# Altium PCB PCB.PcbDoc (part 3 of 4)
Units mil, origin at the board's own origin, x right, y up, seen from the top; angles counter-clockwise.
Board outline 2958.79 x 990.23 mil, 2 copper layers (Component Side, Bottom Layer), stack 63.78 mil thick; 63 components, 40 nets, 198 pads, 73 vias.
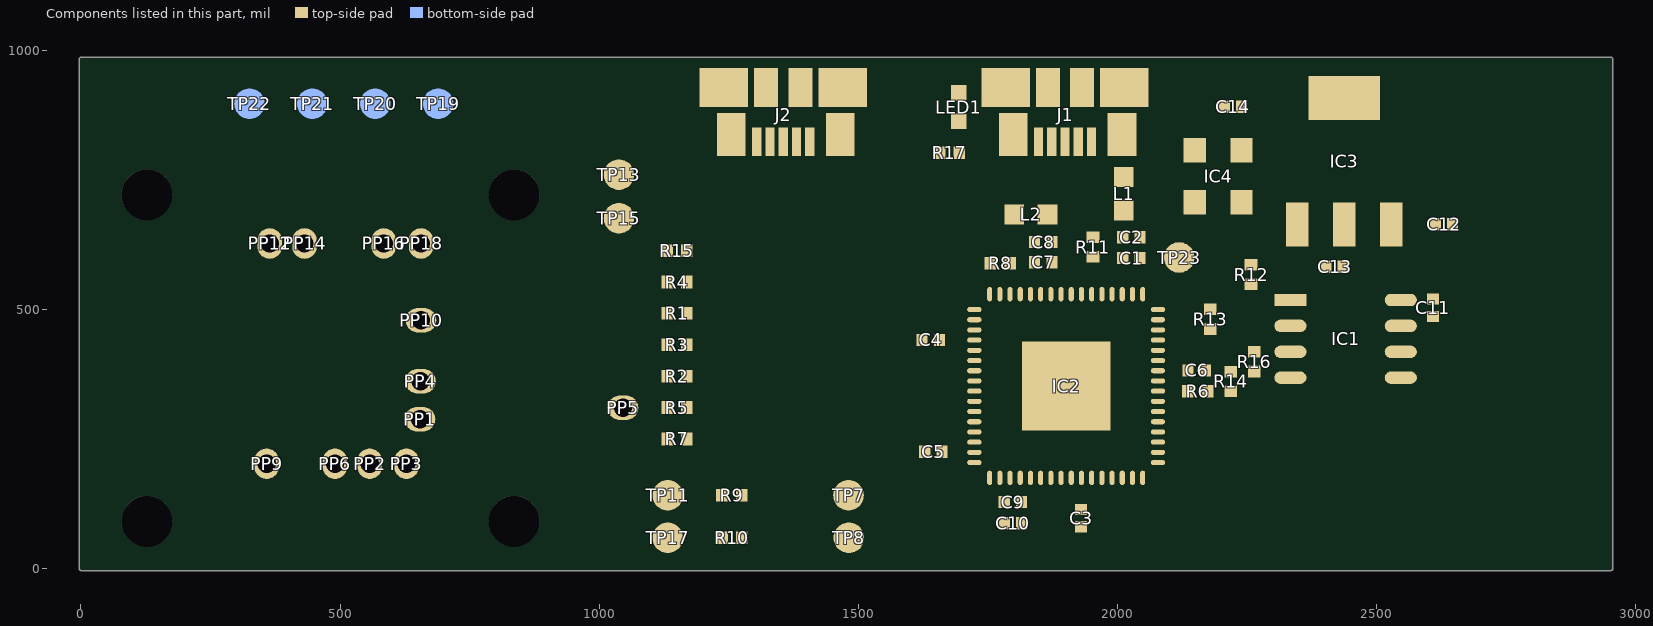
[diagram p3: the components of this part, seen from the top]

## Via types
v1: diameter 23.62, hole 9.84, Component Side to Bottom Layer, 73 vias

## Nets (pads, with @x,y where several pads share a name; then routed paths per layer and width w, separated by ;. In a path a pad name is that pad's centre, name@x,y a point inside that pad or via, vN(x,y) a via of type N, cw(c..) or ccw(c..) an arc to the next point about the centre after c; other vN are vias at no path point) (continued)
copper on no net: (continued)
  Component Side w0.3: 2786.45,721.99 2798.15,721.99 ; 2786.45,912.18 2837.15,912.18 ; 2786.75,702.79 2798.15,702.79 ; 2786.75,722.29 2797.85,722.29 ; 2787.05,702.49 2797.85,702.49 ; 2787.05,722.59 2797.55,722.59 ; 2787.05,912.48 2836.55,912.48 ; 2787.35,702.19 2797.55,702.19 ; 2787.65,701.89 2796.95,701.89 ; 2787.65,722.89 2796.95,722.89 ; 2787.95,701.59 2796.65,701.59 ; 2787.95,723.19 2796.65,723.19 ; 2787.95,912.78 2835.65,912.78 ; 2788.55,701.29 2796.05,701.29 ; 2788.55,723.49 2796.05,723.49 ; 2788.55,913.08 2835.05,913.08 ; 2789.15,700.99 2795.45,700.99 ; 2789.15,723.79 2795.45,723.79 ; 2789.45,913.38 2834.15,913.38 ; 2789.75,724.09 2794.55,724.09 ; 2790.05,700.69 2794.55,700.69 ; 2790.05,913.68 2833.55,913.68 ; 2790.95,913.98 2832.65,913.98 ; 2791.25,724.39 2793.35,724.39 ; 2791.55,914.28 2832.05,914.28 ; 2792.15,700.39 2792.75,700.39 ; 2792.15,914.58 2831.45,914.58 ; 2793.05,914.88 2830.55,914.88 ; 2793.65,915.18 2829.95,915.18 ; 2794.25,719.89 2803.25,719.89 ; 2794.25,915.48 2829.35,915.48 ; 2794.85,915.78 2828.75,915.78 ; 2795.15,916.08 2828.45,916.08 ; 2795.15,916.38 2828.45,916.38 ; 2795.45,705.19 2803.25,705.19 ; 2795.45,916.68 2828.15,916.68 ; 2795.45,916.98 2828.15,916.98 ; 2795.45,917.28 2828.15,917.28 ; 2795.45,917.58 2828.15,917.58 ; 2795.45,917.88 2828.15,917.88 ; 2795.75,719.59 2803.25,719.59 ; 2795.75,918.18 2827.85,918.18 ; 2795.75,918.48 2827.85,918.48 ; 2795.75,918.78 2827.85,918.78 ; 2795.75,919.08 2827.85,919.08 ; 2795.75,919.38 2827.85,919.38 ; 2795.75,919.68 2827.85,919.68 ; 2796.05,919.98 2827.55,919.98 ; 2796.05,920.28 2827.55,920.28 ; 2796.05,920.58 2827.55,920.58 ; 2796.05,920.88 2827.55,920.88 ; 2796.05,921.18 2827.55,921.18 ; 2796.35,705.49 2803.25,705.49 ; 2796.35,719.29 2803.25,719.29 ; 2796.35,921.48 2827.25,921.48 ; 2796.35,921.78 2827.25,921.78 ; 2796.35,922.08 2827.25,922.08 ; 2796.35,922.38 2827.25,922.38 ; 2796.35,922.68 2827.25,922.68 ; 2796.65,705.79 2803.25,705.79 ; 2796.65,718.99 2803.25,718.99 ; 2796.65,922.98 2826.95,922.98 ; 2796.65,923.28 2826.95,923.28 ; 2796.65,923.58 2826.95,923.58 ; 2796.65,923.88 2826.95,923.88 ; 2796.65,924.18 2826.95,924.18 ; 2796.65,924.48 2826.95,924.48 ; 2796.95,706.09 2803.25,706.09 ; 2796.95,924.78 2826.65,924.78 ; 2796.95,925.08 2826.65,925.08 ; 2796.95,925.38 2826.65,925.38 ; 2796.95,925.68 2826.65,925.68 ; 2796.95,925.98 2826.65,925.98 ; 2797.25,706.39 2803.25,706.39 ; 2797.25,718.39 2803.25,718.39 ; 2797.25,718.69 2803.25,718.69 ; 2797.25,926.28 2826.35,926.28 ; 2797.25,926.58 2826.35,926.58 ; 2797.25,926.88 2826.35,926.88 ; 2797.25,927.18 2826.35,927.18 ; 2797.25,927.48 2826.35,927.48 ; 2797.55,706.69 2803.25,706.69 ; 2797.55,706.99 2803.25,706.99 ; 2797.55,718.09 2803.25,718.09 ; 2797.55,927.78 2826.35,927.78 ; 2797.55,928.08 2826.05,928.08 ; 2797.55,928.38 2826.05,928.38 ; 2797.55,928.68 2826.05,928.68 ; 2797.55,928.98 2826.05,928.98 ; 2797.55,929.28 2826.05,929.28 ; 2797.85,707.29 2803.25,707.29 ; 2797.85,717.49 2803.25,717.49 ; 2797.85,717.79 2803.25,717.79 ; 2797.85,929.58 2825.75,929.58 ; 2797.85,929.88 2825.75,929.88 ; 2797.85,930.18 2825.75,930.18 ; 2797.85,930.48 2825.75,930.48 ; 2797.85,930.78 2825.75,930.78 ; 2798.15,707.59 2803.25,707.59 ; 2798.15,707.89 2803.25,707.89 ; 2798.15,708.19 2803.25,708.19 ; 2798.15,708.49 2803.25,708.49 ; 2798.15,716.59 2803.25,716.59 ; 2798.15,716.89 2803.25,716.89 ; 2798.15,717.19 2803.25,717.19 ; 2798.15,931.08 2825.45,931.08 ; 2798.15,931.38 2825.45,931.38 ; 2798.15,931.68 2825.45,931.68 ; 2798.15,931.98 2825.45,931.98 ; 2798.15,932.28 2825.45,932.28 ; 2798.15,932.58 2825.45,932.58 ; 2798.45,708.79 2803.25,708.79 ; 2798.45,709.09 2803.25,709.09 ; 2798.45,709.39 2803.25,709.39 ; 2798.45,709.69 2803.25,709.69 ; 2798.45,709.99 2803.25,709.99 ; 2798.45,710.29 2803.25,710.29 ; 2798.45,710.59 2803.25,710.59 ; 2798.45,710.89 2803.25,710.89 ; 2798.45,711.19 2803.25,711.19 ; 2798.45,711.49 2803.25,711.49 ; 2798.45,713.29 2803.25,713.29 ; 2798.45,713.59 2803.25,713.59 ; 2798.45,713.89 2803.25,713.89 ; 2798.45,714.19 2803.25,714.19 ; 2798.45,714.49 2803.25,714.49 ; 2798.45,714.79 2803.25,714.79 ; 2798.45,715.09 2803.25,715.09 ; 2798.45,715.39 2803.25,715.39 ; 2798.45,715.69 2803.25,715.69 ; 2798.45,715.99 2803.25,715.99 ; 2798.45,716.29 2803.25,716.29 ; 2798.45,932.88 2825.15,932.88 ; 2798.45,933.18 2825.15,933.18 ; 2798.45,933.48 2825.15,933.48 ; 2798.45,933.78 2825.15,933.78 ; 2798.45,934.08 2825.15,934.08 ; 2798.75,700.69 2803.25,700.69 ; 2798.75,700.99 2803.25,700.99 ; 2798.75,701.29 2803.25,701.29 ; 2798.75,701.59 2803.25,701.59 ; 2798.75,701.89 2803.25,701.89 ; 2798.75,702.19 2803.25,702.19 ; 2798.75,702.49 2803.25,702.49 ; 2798.75,702.79 2803.25,702.79 ; 2798.75,711.79 2803.25,711.79 ; 2798.75,712.09 2803.25,712.09 ; 2798.75,712.39 2803.25,712.39 ; 2798.75,712.69 2803.25,712.69 ; 2798.75,712.99 2803.25,712.99 ; 2798.75,721.99 2803.25,721.99 ; 2798.75,722.29 2803.25,722.29 ; 2798.75,722.59 2803.25,722.59 ; 2798.75,722.89 2803.25,722.89 ; 2798.75,723.19 2803.25,723.19 ; 2798.75,723.49 2803.25,723.49 ; 2798.75,723.79 2803.25,723.79 ; 2798.75,724.09 2803.25,724.09 ; 2798.75,724.39 2803.25,724.39 ; 2798.75,724.69 2803.25,724.69 ; 2798.75,724.99 2803.25,724.99 ; 2798.75,725.29 2803.25,725.29 ; 2798.75,725.59 2803.25,725.59 ; 2798.75,725.89 2803.25,725.89 ; 2798.75,726.19 2803.25,726.19 ; 2798.75,726.49 2803.25,726.49 ; 2798.75,726.79 2803.25,726.79 ; 2798.75,727.09 2803.25,727.09 ; 2798.75,727.39 2803.25,727.39 ; 2798.75,727.69 2803.25,727.69 ; 2798.75,727.99 2803.25,727.99 ; 2798.75,728.29 2803.25,728.29 ; 2798.75,728.59 2803.25,728.59 ; 2798.75,728.89 2803.25,728.89 ; 2798.75,729.19 2803.25,729.19 ; 2798.75,729.49 2803.25,729.49 ; 2798.75,729.79 2803.25,729.79 ; 2798.75,730.09 2803.25,730.09 ; 2798.75,730.39 2803.25,730.39 ; 2798.75,730.69 2803.25,730.69 ; 2798.75,730.99 2803.25,730.99 ; 2798.75,731.29 2803.25,731.29 ; 2798.75,731.59 2803.25,731.59 ; 2798.75,731.89 2803.25,731.89 ; 2798.75,732.19 2803.25,732.19 ; 2798.75,732.49 2803.25,732.49 ; 2798.75,732.79 2803.25,732.79 ; 2798.75,733.09 2803.25,733.09 ; 2798.75,733.39 2803.25,733.39 ; 2798.75,733.69 2803.25,733.69 ; 2798.75,934.38 2824.85,934.38 ; 2798.75,934.68 2824.85,934.68 ; 2798.75,934.98 2824.85,934.98 ; 2798.75,935.28 2824.85,935.28 ; 2798.75,935.58 2824.85,935.58 ; 2799.05,935.88 2824.55,935.88 ; 2799.05,936.18 2824.55,936.18 ; 2799.05,936.48 2824.55,936.48 ; 2799.05,936.78 2824.55,936.78 ; 2799.05,937.08 2824.55,937.08 ; 2799.05,937.38 2824.55,937.38 ; 2799.35,742.09 2818.85,742.09 ; 2799.35,937.68 2824.25,937.68 ; 2799.35,937.98 2824.25,937.98 ; 2799.35,938.28 2824.25,938.28 ; 2799.35,938.58 2824.25,938.58 ; 2799.35,938.88 2824.25,938.88 ; 2799.65,742.39 2808.35,742.39 ; 2799.65,939.18 2823.95,939.18 ; 2799.65,939.48 2823.95,939.48 ; 2799.95,741.79 2818.55,741.79 ; 2799.95,742.69 2807.15,742.69 ; 2799.95,939.78 2823.65,939.78 ; 2800.25,741.49 2818.25,741.49 ; 2800.25,742.99 2805.95,742.99 ; 2800.55,741.19 2817.95,741.19 ; 2800.55,743.29 2805.35,743.29 ; 2800.55,940.08 2823.05,940.08 ; 2800.85,740.89 2817.95,740.89 ; 2800.85,743.59 2804.75,743.59 ; 2800.85,754.09 2805.65,754.09 ; 2800.85,754.39 2805.65,754.39 ; 2800.85,754.69 2805.65,754.69 ; 2800.85,754.99 2805.65,754.99 ; 2800.85,755.29 2805.65,755.29 ; 2800.85,755.59 2805.65,755.59 ; 2801.15,743.89 2804.45,743.89 ; 2801.15,752.89 2807.15,752.89 ; 2801.15,753.19 2806.55,753.19 ; 2801.15,753.49 2805.95,753.49 ; 2801.15,753.79 2805.95,753.79 ; 2801.15,755.89 2805.65,755.89 ; 2801.15,756.19 2805.95,756.19 ; 2801.15,756.49 2805.95,756.49 ; 2801.15,756.79 2806.25,756.79 ; 2801.15,757.09 2806.55,757.09 ; 2801.45,740.59 2817.65,740.59 ; 2801.45,744.19 2803.85,744.19 ; 2801.45,751.99 2814.05,751.99 ; 2801.45,752.29 2811.35,752.29 ; 2801.45,752.59 2808.05,752.59 ; 2801.45,757.39 2807.15,757.39 ; 2801.45,757.69 2808.65,757.69 ; 2801.45,757.99 2817.95,757.99 ; 2801.75,740.29 2817.05,740.29 ; 2801.75,744.49 2803.55,744.49 ; 2801.75,751.39 2815.85,751.39 ; 2801.75,751.69 2815.25,751.69 ; 2801.75,758.29 2818.25,758.29 ; 2802.05,744.79 2803.25,744.79 ; 2802.05,751.09 2816.45,751.09 ; 2802.05,758.59 2818.55,758.59 ; 2802.05,758.89 2818.85,758.89 ; 2802.35,739.99 2816.75,739.99 ; 2802.35,745.09 2802.95,745.09 ; 2802.35,750.79 2817.05,750.79 ; 2802.35,759.19 2818.55,759.19 ; 2802.65,750.49 2817.35,750.49 ; 2802.65,759.49 2818.25,759.49 ; 2802.95,739.69 2816.45,739.69 ; 2802.95,750.19 2817.65,750.19 ; 2802.95,759.79 2817.65,759.79 ; 2803.25,749.89 2817.95,749.89 ; 2803.25,760.09 2817.35,760.09 ; 2803.55,739.39 2815.85,739.39 ; 2803.55,749.59 2818.25,749.59 ; 2803.55,760.39 2816.75,760.39 ; 2804.15,739.09 2815.25,739.09 ; 2804.15,749.29 2818.25,749.29 ; 2804.15,760.69 2816.15,760.69 ; 2804.45,760.99 2815.55,760.99 ; 2804.75,748.99 2818.55,748.99 ; 2805.05,738.79 2814.65,738.79 ; 2805.35,748.69 2818.85,748.69 ; 2805.35,761.29 2814.65,761.29 ; 2805.95,724.09 2810.75,724.09 ; 2805.95,738.49 2813.75,738.49 ; 2805.95,761.59 2813.75,761.59 ; 2806.25,723.19 2811.05,723.19 ; 2806.25,723.49 2811.05,723.49 ; 2806.25,723.79 2811.05,723.79 ; 2806.55,722.29 2811.35,722.29 ; 2806.55,722.59 2811.35,722.59 ; 2806.55,722.89 2811.35,722.89 ; 2806.55,748.39 2818.85,748.39 ; 2806.85,721.39 2811.65,721.39 ; 2806.85,721.69 2811.65,721.69 ; 2806.85,721.99 2811.35,721.99 ; 2807.15,720.49 2811.95,720.49 ; 2807.15,720.79 2811.65,720.79 ; 2807.15,721.09 2811.65,721.09 ; 2807.15,738.19 2812.25,738.19 ; 2807.45,719.29 2812.25,719.29 ; 2807.45,719.59 2812.25,719.59 ; 2807.45,719.89 2811.95,719.89 ; 2807.45,720.19 2811.95,720.19 ; 2807.45,761.89 2812.55,761.89 ; 2807.75,718.39 2812.55,718.39 ; 2807.75,718.69 2812.25,718.69 ; 2807.75,718.99 2812.25,718.99 ; 2808.05,717.49 2812.55,717.49 ; 2808.05,717.79 2812.55,717.79 ; 2808.05,718.09 2812.55,718.09 ; 2808.35,716.59 2812.85,716.59 ; 2808.35,716.89 2812.85,716.89 ; 2808.35,717.19 2812.85,717.19 ; 2808.65,715.69 2813.15,715.69 ; 2808.65,715.99 2813.15,715.99 ; 2808.65,716.29 2813.15,716.29 ; 2808.95,714.79 2813.45,714.79 ; 2808.95,715.09 2813.45,715.09 ; 2808.95,715.39 2813.15,715.39 ; 2809.25,713.89 2813.75,713.89 ; 2809.25,714.19 2813.45,714.19 ; 2809.25,714.49 2813.45,714.49 ; 2809.25,748.09 2818.85,748.09 ; 2809.55,712.69 2814.05,712.69 ; 2809.55,712.99 2814.05,712.99 ; 2809.55,713.29 2813.75,713.29 ; 2809.55,713.59 2813.75,713.59 ; 2809.85,711.79 2814.35,711.79 ; 2809.85,712.09 2814.05,712.09 ; 2809.85,712.39 2814.05,712.39 ; 2810.15,710.89 2814.35,710.89 ; 2810.15,711.19 2814.35,711.19 ; 2810.15,711.49 2814.35,711.49 ; 2810.45,709.99 2814.65,709.99 ; 2810.45,710.29 2814.65,710.29 ; 2810.45,710.59 2814.65,710.59 ; 2810.75,709.09 2814.95,709.09 ; 2810.75,709.39 2814.95,709.39 ; 2810.75,709.69 2814.95,709.69 ; 2811.05,708.19 2815.25,708.19 ; 2811.05,708.49 2815.25,708.49 ; 2811.05,708.79 2814.95,708.79 ; 2811.05,757.69 2817.65,757.69 ; 2811.35,707.29 2819.45,707.29 ; 2811.35,707.59 2819.75,707.59 ; 2811.35,707.89 2815.25,707.89 ; 2811.65,706.39 2819.45,706.39 ; 2811.65,706.69 2819.45,706.69 ; 2811.65,706.99 2819.45,706.99 ; 2811.65,742.39 2818.85,742.39 ; 2811.95,705.19 2818.85,705.19 ; 2811.95,705.49 2819.15,705.49 ; 2811.95,705.79 2819.15,705.79 ; 2811.95,706.09 2819.15,706.09 ; 2812.25,704.29 2818.85,704.29 ; 2812.25,704.59 2818.85,704.59 ; 2812.25,704.89 2818.85,704.89 ; 2812.25,747.79 2819.15,747.79 ; 2812.55,703.39 2818.55,703.39 ; 2812.55,703.69 2818.55,703.69 ; 2812.55,703.99 2818.55,703.99 ; 2812.55,742.69 2818.85,742.69 ; 2812.55,757.39 2817.65,757.39 ; 2812.85,702.49 2818.25,702.49 ; 2812.85,702.79 2818.25,702.79 ; 2812.85,703.09 2818.25,703.09 ; 2813.15,701.59 2817.95,701.59 ; 2813.15,701.89 2817.95,701.89 ; 2813.15,702.19 2817.95,702.19 ; 2813.45,700.69 2817.65,700.69 ; 2813.45,700.99 2817.65,700.99 ; 2813.45,701.29 2817.95,701.29 ; 2813.45,742.99 2819.15,742.99 ; 2813.45,747.49 2819.15,747.49 ; 2813.45,757.09 2817.35,757.09 ; 2813.45,876.18 2873.45,876.18 ; 2813.75,743.29 2819.15,743.29 ; 2814.05,743.59 2819.15,743.59 ; 2814.05,747.19 2819.15,747.19 ; 2814.05,756.79 2817.05,756.79 ; 2814.35,743.89 2819.45,743.89 ; 2814.35,746.89 2819.45,746.89 ; 2814.65,744.19 2819.45,744.19 ; 2814.65,744.49 2819.45,744.49 ; 2814.65,745.99 2819.45,745.99 ; 2814.65,746.29 2819.45,746.29 ; 2814.65,746.59 2819.45,746.59 ; 2814.65,756.49 2816.75,756.49 ; 2814.95,744.79 2819.45,744.79 ; 2814.95,745.09 2819.45,745.09 ; 2814.95,745.39 2819.45,745.39 ; 2814.95,745.69 2819.45,745.69 ; 2815.25,756.19 2816.45,756.19 ; 2815.55,755.89 2816.15,755.89 ; 2815.85,707.89 2819.75,707.89 ; 2815.85,708.19 2819.75,708.19 ; 2815.85,708.49 2820.05,708.49 ; 2815.85,875.88 2873.45,875.88 ; 2816.15,708.79 2820.05,708.79 ; 2816.15,709.09 2820.05,709.09 ; 2816.15,709.39 2820.35,709.39 ; 2816.45,709.69 2820.35,709.69 ; 2816.45,709.99 2820.35,709.99 ; 2816.45,710.29 2820.35,710.29 ; 2816.75,710.59 2820.65,710.59 ; 2816.75,710.89 2820.65,710.89 ; 2816.75,711.19 2820.65,711.19 ; 2817.05,711.49 2820.95,711.49 ; 2817.05,711.79 2820.95,711.79 ; 2817.05,712.09 2820.95,712.09 ; 2817.35,712.39 2821.25,712.39 ; 2817.35,712.69 2821.25,712.69 ; 2817.35,712.99 2821.25,712.99 ; 2817.35,875.58 2873.45,875.58 ; 2817.65,713.29 2821.25,713.29 ; 2817.65,713.59 2821.55,713.59 ; 2817.65,713.89 2821.55,713.89 ; 2817.95,714.19 2821.55,714.19 ; 2817.95,714.49 2821.85,714.49 ; 2817.95,714.79 2821.85,714.79 ; 2817.95,715.09 2821.85,715.09 ; 2818.25,715.39 2822.15,715.39 ; 2818.25,715.69 2822.15,715.69 ; 2818.25,715.99 2822.15,715.99 ; 2818.55,716.29 2822.15,716.29 ; 2818.55,716.59 2822.45,716.59 ; 2818.55,716.89 2822.45,716.89 ; 2818.55,875.28 2873.75,875.28 ; 2818.85,717.19 2822.45,717.19 ; 2818.85,717.49 2826.65,717.49 ; 2818.85,717.79 2826.35,717.79 ; 2819.15,718.09 2826.35,718.09 ; 2819.15,718.39 2826.35,718.39 ; 2819.15,718.69 2826.05,718.69 ; 2819.45,718.99 2826.05,718.99 ; 2819.45,719.29 2826.05,719.29 ; 2819.45,719.59 2825.75,719.59 ; 2819.75,719.89 2825.75,719.89 ; 2819.75,720.19 2825.75,720.19 ; 2819.75,720.49 2825.45,720.49 ; 2819.75,874.98 2873.75,874.98 ; 2820.05,720.79 2825.45,720.79 ; 2820.05,721.09 2825.45,721.09 ; 2820.05,721.39 2825.15,721.39 ; 2820.35,721.69 2825.15,721.69 ; 2820.35,721.99 2825.15,721.99 ; 2820.35,722.29 2825.15,722.29 ; 2820.35,874.68 2874.05,874.68 ; 2820.65,722.59 2824.85,722.59 ; 2820.65,722.89 2824.85,722.89 ; 2820.65,723.19 2824.85,723.19 ; 2820.95,723.49 2824.55,723.49 ; 2820.95,723.79 2824.55,723.79 ; 2820.95,724.09 2824.55,724.09 ; 2821.25,874.38 2874.05,874.38 ; 2821.55,826.98 2874.05,826.98 ; 2821.55,827.28 2874.35,827.28 ; 2821.55,827.58 2874.35,827.58 ; 2821.85,826.38 2873.75,826.38 ; 2821.85,826.68 2874.05,826.68 ; 2821.85,827.88 2874.35,827.88 ; 2821.85,874.08 2874.05,874.08 ; 2822.15,825.49 2873.45,825.49 ; 2822.15,825.78 2873.75,825.78 ; 2822.15,826.08 2873.75,826.08 ; 2822.15,828.18 2874.65,828.18 ; 2822.45,746.59 2827.25,746.59 ; 2822.45,746.89 2827.25,746.89 ; 2822.45,747.19 2827.25,747.19 ; 2822.45,747.49 2826.95,747.49 ; 2822.45,747.79 2826.95,747.79 ; 2822.45,748.09 2826.95,748.09 ; 2822.45,748.39 2826.95,748.39 ; 2822.45,748.69 2826.95,748.69 ; 2822.45,748.99 2826.95,748.99 ; 2822.45,749.29 2826.95,749.29 ; 2822.45,749.59 2826.95,749.59 ; 2822.45,749.89 2826.95,749.89 ; 2822.45,750.19 2826.95,750.19 ; 2822.45,750.49 2826.95,750.49 ; 2822.45,750.79 2826.95,750.79 ; 2822.45,751.09 2826.95,751.09 ; 2822.45,751.39 2826.95,751.39 ; 2822.45,751.69 2826.95,751.69 ; 2822.45,751.99 2826.95,751.99 ; 2822.45,752.29 2826.95,752.29 ; 2822.45,752.59 2826.95,752.59 ; 2822.45,752.89 2827.25,752.89 ; 2822.45,753.19 2827.25,753.19 ; 2822.45,753.49 2827.25,753.49 ; 2822.45,824.88 2873.15,824.88 ; 2822.45,825.18 2873.45,825.18 ; 2822.45,828.48 2874.65,828.48 ; 2822.45,873.78 2874.35,873.78 ; 2822.75,717.19 2826.65,717.19 ; 2822.75,745.09 2827.85,745.09 ; 2822.75,745.39 2827.55,745.39 ; 2822.75,745.69 2827.55,745.69 ; 2822.75,745.99 2827.25,745.99 ; 2822.75,746.29 2827.25,746.29 ; 2822.75,753.79 2827.25,753.79 ; 2822.75,754.09 2827.25,754.09 ; 2822.75,754.39 2827.55,754.39 ; 2822.75,754.69 2827.55,754.69 ; 2822.75,754.99 2827.85,754.99 ; 2822.75,824.28 2873.15,824.28 ; 2822.75,824.58 2873.15,824.58 ; 2823.05,716.29 2826.95,716.29 ; 2823.05,716.59 2826.95,716.59 ; 2823.05,716.89 2826.65,716.89 ; 2823.05,744.19 2828.45,744.19 ; 2823.05,744.49 2828.15,744.49 ; 2823.05,744.79 2827.85,744.79 ; 2823.05,755.29 2827.85,755.29 ; 2823.05,755.59 2828.15,755.59 ; 2823.05,755.89 2828.45,755.89 ; 2823.05,823.38 2872.55,823.38 ; 2823.05,823.68 2872.85,823.68 ; 2823.05,823.99 2872.85,823.99 ; 2823.05,828.78 2874.95,828.78 ; 2823.05,873.48 2874.35,873.48 ; 2823.35,715.09 2827.25,715.09 ; 2823.35,715.39 2827.25,715.39 ; 2823.35,715.69 2827.25,715.69 ; 2823.35,715.99 2826.95,715.99 ; 2823.35,743.29 2829.35,743.29 ; 2823.35,743.59 2829.05,743.59 ; 2823.35,743.89 2828.75,743.89 ; 2823.35,756.19 2828.75,756.19 ; 2823.35,756.49 2829.05,756.49 ; 2823.35,756.79 2829.35,756.79 ; 2823.35,822.78 2872.55,822.78 ; 2823.35,823.09 2872.55,823.09 ; 2823.35,829.08 2874.95,829.08 ; 2823.65,714.19 2827.55,714.19 ; 2823.65,714.49 2827.55,714.49 ; 2823.65,714.79 2827.55,714.79 ; 2823.65,742.69 2830.85,742.69 ; 2823.65,742.99 2829.95,742.99 ; 2823.65,757.09 2829.95,757.09 ; 2823.65,757.39 2830.85,757.39 ; 2823.65,821.88 2871.95,821.88 ; 2823.65,822.18 2872.25,822.18 ; 2823.65,822.49 2872.25,822.49 ; 2823.65,873.18 2874.65,873.18 ; 2823.95,713.29 2827.85,713.29 ; 2823.95,713.59 2827.85,713.59 ; 2823.95,713.89 2827.85,713.89 ; 2823.95,742.39 2840.45,742.39 ; 2823.95,757.69 2840.45,757.69 ; 2823.95,821.28 2871.95,821.28 ; 2823.95,821.59 2871.95,821.59 ; 2823.95,829.38 2874.95,829.38 ; 2824.25,712.09 2828.45,712.09 ; 2824.25,712.39 2828.15,712.39 ; 2824.25,712.69 2828.15,712.69 ; 2824.25,712.99 2828.15,712.99 ; 2824.25,741.79 2839.85,741.79 ; 2824.25,742.09 2840.15,742.09 ; 2824.25,757.99 2840.15,757.99 ; 2824.25,758.29 2839.85,758.29 ; 2824.25,820.68 2871.65,820.68 ; 2824.25,820.99 2871.65,820.99 ; 2824.25,829.68 2875.25,829.68 ; 2824.25,872.88 2874.65,872.88 ; 2824.55,711.19 2828.45,711.19 ; 2824.55,711.49 2828.45,711.49 ; 2824.55,711.79 2828.45,711.79 ; 2824.55,741.49 2839.55,741.49 ; 2824.55,758.59 2839.55,758.59 ; 2824.55,819.78 2871.35,819.78 ; 2824.55,820.09 2871.35,820.09 ; 2824.55,820.38 2871.35,820.38 ; 2824.85,710.29 2828.75,710.29 ; 2824.85,710.59 2828.75,710.59 ; 2824.85,710.89 2828.75,710.89 ; 2824.85,741.19 2839.55,741.19 ; 2824.85,758.89 2839.55,758.89 ; 2824.85,819.18 2871.05,819.18 ; 2824.85,819.49 2871.05,819.49 ; 2824.85,829.98 2875.25,829.98 ; 2824.85,872.58 2874.95,872.58 ; 2825.15,709.09 2829.35,709.09 ; 2825.15,709.39 2829.05,709.39 ; 2825.15,709.69 2829.05,709.69 ; 2825.15,709.99 2829.05,709.99 ; 2825.15,740.89 2839.25,740.89 ; 2825.15,759.19 2839.25,759.19 ; 2825.15,818.28 2870.75,818.28 ; 2825.15,818.59 2870.75,818.59 ; 2825.15,818.88 2870.75,818.88 ; 2825.15,830.28 2875.55,830.28 ; 2825.15,872.28 2874.95,872.28 ; 2825.45,708.19 2829.65,708.19 ; 2825.45,708.49 2829.35,708.49 ; 2825.45,708.79 2829.35,708.79 ; 2825.45,740.59 2838.95,740.59 ; 2825.45,759.49 2838.95,759.49 ; 2825.45,817.68 2870.45,817.68 ; 2825.45,817.99 2870.45,817.99 ; 2825.45,830.58 2875.55,830.58 ; 2825.75,707.29 2834.15,707.29 ; 2825.75,707.59 2834.15,707.59 ; 2825.75,707.89 2829.65,707.89 ; 2825.75,740.29 2838.65,740.29 ; 2825.75,759.79 2838.65,759.79 ; 2825.75,816.79 2870.15,816.79 ; 2825.75,817.09 2870.15,817.09 ; 2825.75,817.38 2870.15,817.38 ; 2825.75,871.98 2874.95,871.98 ; 2826.05,706.09 2833.55,706.09 ; 2826.05,706.39 2833.85,706.39 ; 2826.05,706.69 2833.85,706.69 ; 2826.05,706.99 2833.85,706.99 ; 2826.05,739.99 2838.35,739.99 ; 2826.05,760.09 2838.35,760.09 ; 2826.05,816.18 2870.15,816.18 ; 2826.05,816.49 2870.15,816.49 ; 2826.05,830.88 2875.55,830.88 ; 2826.05,871.68 2875.25,871.68 ; 2826.35,705.19 2833.25,705.19 ; 2826.35,705.49 2833.55,705.49 ; 2826.35,705.79 2833.55,705.79 ; 2826.35,739.69 2837.75,739.69 ; 2826.35,760.39 2837.75,760.39 ; 2826.35,815.59 2870.45,815.59 ; 2826.35,815.89 2870.45,815.89 ; 2826.35,831.18 2875.85,831.18 ; 2826.65,704.29 2832.95,704.29 ; 2826.65,704.59 2833.25,704.59 ; 2826.65,704.89 2833.25,704.89 ; 2826.65,814.69 2871.05,814.69 ; 2826.65,814.99 2871.05,814.99 ; 2826.65,815.29 2870.75,815.29 ; 2826.65,831.48 2875.85,831.48 ; 2826.65,871.38 2875.25,871.38 ; 2826.95,703.09 2832.65,703.09 ; 2826.95,703.39 2832.65,703.39 ; 2826.95,703.69 2832.95,703.69 ; 2826.95,703.99 2832.95,703.99 ; 2826.95,739.39 2837.45,739.39 ; 2826.95,760.69 2837.45,760.69 ; 2826.95,814.09 2871.65,814.09 ; 2826.95,814.39 2871.35,814.39 ; 2826.95,871.08 2875.55,871.08 ; 2827.25,702.19 2832.35,702.19 ; 2827.25,702.49 2832.35,702.49 ; 2827.25,702.79 2832.65,702.79 ; 2827.25,739.09 2836.85,739.09 ; 2827.25,813.19 2872.25,813.19 ; 2827.25,813.49 2871.95,813.49 ; 2827.25,813.79 2871.65,813.79 ; 2827.25,831.78 2876.15,831.78 ; 2827.25,870.78 2875.55,870.78 ; 2827.55,701.29 2832.05,701.29 ; 2827.55,701.59 2832.05,701.59 ; 2827.55,701.89 2832.35,701.89 ; 2827.55,760.99 2836.85,760.99 ; 2827.55,812.59 2872.55,812.59 ; 2827.55,812.89 2872.25,812.89 ; 2827.55,832.08 2876.15,832.08 ; 2827.85,700.69 2832.05,700.69 ; 2827.85,700.99 2832.05,700.99 ; 2827.85,811.99 2872.85,811.99 ; 2827.85,812.29 2872.85,812.29 ; 2827.85,832.38 2876.15,832.38 ; 2827.85,870.48 2875.85,870.48 ; 2828.15,738.79 2836.25,738.79 ; 2828.15,761.29 2836.25,761.29 ; 2828.15,811.09 2873.75,811.09 ; 2828.15,811.39 2873.45,811.39 ; 2828.15,811.69 2873.15,811.69 ; 2828.15,832.68 2876.45,832.68 ; 2828.15,870.18 2875.85,870.18 ; 2828.45,810.49 2874.05,810.49 ; 2828.45,810.79 2873.75,810.79 ; 2828.45,832.98 2876.45,832.98 ; 2828.45,869.88 2875.85,869.88 ; 2828.75,738.49 2835.35,738.49 ; 2828.75,809.59 2874.65,809.59 ; 2828.75,809.89 2874.35,809.89 ; 2828.75,810.19 2874.35,810.19 ; 2828.75,833.28 2876.75,833.28 ; 2828.75,869.58 2876.15,869.58 ; 2829.05,761.59 2835.35,761.59 ; 2829.05,808.99 2874.95,808.99 ; 2829.05,809.29 2874.95,809.29 ; 2829.05,869.28 2876.15,869.28 ; 2829.35,808.09 2875.55,808.09 ; 2829.35,808.39 2875.55,808.39 ; 2829.35,808.69 2875.25,808.69 ; 2829.35,833.58 2876.75,833.58 ; 2829.35,868.98 2876.45,868.98 ; 2829.65,807.49 2876.15,807.49 ; 2829.65,807.79 2875.85,807.79 ; 2829.65,833.88 2876.75,833.88 ; 2829.65,868.68 2876.45,868.68 ; 2829.95,738.19 2834.15,738.19 ; 2829.95,761.89 2834.45,761.89 ; 2829.95,806.89 2876.45,806.89 ; 2829.95,807.19 2876.15,807.19 ; 2829.95,834.18 2877.05,834.18 ; 2829.95,868.38 2876.75,868.38 ; 2830.25,707.89 2834.15,707.89 ; 2830.25,708.19 2834.45,708.19 ; 2830.25,708.49 2834.45,708.49 ; 2830.25,708.79 2834.45,708.79 ; 2830.25,805.99 2877.05,805.99 ; 2830.25,806.29 2876.75,806.29 ; 2830.25,806.59 2876.75,806.59 ; 2830.25,834.48 2877.35,834.48 ; 2830.25,834.78 2877.35,834.78 ; 2830.25,868.08 2877.35,868.08 ; 2830.55,709.09 2834.45,709.09 ; 2830.55,709.39 2834.75,709.39 ; 2830.55,709.69 2834.75,709.69 ; 2830.55,709.99 2834.75,709.99 ; 2830.55,805.39 2877.65,805.39 ; 2830.55,805.69 2877.35,805.69 ; 2830.55,835.08 2877.95,835.08 ; 2830.55,867.78 2877.95,867.78 ; 2830.85,710.29 2835.05,710.29 ; 2830.85,710.59 2835.05,710.59 ; 2830.85,710.89 2835.05,710.89 ; 2830.85,804.49 2878.25,804.49 ; 2830.85,804.79 2877.95,804.79 ; 2830.85,805.09 2877.65,805.09 ; 2830.85,835.38 2879.15,835.38 ; 2830.85,867.48 2879.45,867.48 ; 2831.15,711.19 2835.35,711.19 ; 2831.15,711.49 2835.35,711.49 ; 2831.15,711.79 2835.35,711.79 ; 2831.15,712.09 2835.65,712.09 ; 2831.15,803.89 2878.55,803.89 ; 2831.15,804.19 2878.25,804.19 ; 2831.15,835.68 2880.65,835.68 ; 2831.15,866.88 2882.75,866.88 ; 2831.15,867.18 2880.95,867.18 ; 2831.45,712.39 2835.65,712.39 ; 2831.45,712.69 2835.65,712.69 ; 2831.45,712.99 2835.95,712.99 ; 2831.45,713.29 2835.95,713.29 ; 2831.45,803.29 2878.85,803.29 ; 2831.45,803.59 2878.85,803.59 ; 2831.45,835.98 2882.15,835.98 ; 2831.45,866.58 2884.25,866.58 ; 2831.75,713.59 2835.95,713.59 ; 2831.75,713.89 2836.25,713.89 ; 2831.75,714.19 2836.25,714.19 ; 2831.75,802.39 2879.45,802.39 ; 2831.75,802.69 2879.45,802.69 ; 2831.75,802.99 2879.15,802.99 ; 2831.75,836.28 2883.95,836.28 ; 2831.75,836.58 2885.45,836.58 ; 2831.75,866.28 2885.75,866.28 ; 2832.05,714.49 2836.25,714.49 ; 2832.05,714.79 2836.55,714.79 ; 2832.05,715.09 2836.55,715.09 ; 2832.05,715.39 2836.55,715.39 ; 2832.05,801.79 2880.05,801.79 ; 2832.05,802.09 2879.75,802.09 ; 2832.05,836.88 2887.25,836.88 ; 2832.05,865.68 2889.05,865.68 ; 2832.05,865.98 2887.55,865.98 ; 2832.35,715.69 2836.55,715.69 ; 2832.35,715.99 2836.85,715.99 ; 2832.35,716.29 2836.85,716.29 ; 2832.35,716.59 2836.85,716.59 ; 2832.35,800.89 2880.65,800.89 ; 2832.35,801.19 2880.35,801.19 ; 2832.35,801.49 2880.05,801.49 ; 2832.35,837.18 2888.75,837.18 ; 2832.35,837.48 2890.25,837.48 ; 2832.35,865.38 2890.85,865.38 ; 2832.65,716.89 2837.15,716.89 ; 2832.65,717.19 2837.15,717.19 ; 2832.65,717.49 2837.15,717.49 ; 2832.65,800.29 2880.95,800.29 ; 2832.65,800.59 2880.95,800.59 ; 2832.65,837.78 2892.05,837.78 ; 2832.65,864.78 2893.85,864.78 ; 2832.65,865.08 2892.35,865.08 ; 2832.95,717.79 2837.45,717.79 ; 2832.95,718.09 2837.45,718.09 ; 2832.95,718.39 2837.45,718.39 ; 2832.95,718.69 2837.75,718.69 ; 2832.95,799.39 2881.55,799.39 ; 2832.95,799.69 2881.55,799.69 ; 2832.95,799.99 2881.25,799.99 ; 2832.95,838.08 2893.55,838.08 ; 2832.95,838.38 2895.05,838.38 ; 2832.95,864.48 2895.65,864.48 ; 2833.25,718.99 2837.75,718.99 ; 2833.25,719.29 2837.75,719.29 ; 2833.25,719.59 2838.05,719.59 ; 2833.25,719.89 2838.05,719.89 ; 2833.25,757.39 2840.45,757.39 ; 2833.25,798.79 2882.15,798.79 ; 2833.25,799.09 2881.85,799.09 ; 2833.25,838.68 2896.85,838.68 ; 2833.25,863.88 2898.65,863.88 ; 2833.25,864.18 2897.15,864.18 ; 2833.55,720.19 2838.05,720.19 ; 2833.55,720.49 2838.35,720.49 ; 2833.55,720.79 2838.35,720.79 ; 2833.55,742.69 2840.45,742.69 ; 2833.55,798.19 2882.45,798.19 ; 2833.55,798.49 2882.15,798.49 ; 2833.55,838.98 2898.35,838.98 ; 2833.55,839.28 2899.55,839.28 ; 2833.55,863.28 2900.15,863.28 ; 2833.55,863.58 2899.85,863.58 ; 2833.85,721.09 2838.35,721.09 ; 2833.85,721.39 2838.65,721.39 ; 2833.85,721.69 2838.65,721.69 ; 2833.85,721.99 2838.65,721.99 ; 2833.85,797.29 2882.75,797.29 ; 2833.85,797.59 2882.75,797.59 ; 2833.85,797.89 2882.45,797.89 ; 2833.85,839.58 2900.15,839.58 ; 2833.85,839.88 2900.15,839.88 ; 2833.85,862.68 2900.45,862.68 ; 2833.85,862.98 2900.45,862.98 ; 2834.15,722.29 2838.95,722.29 ; 2834.15,722.59 2838.95,722.59 ; 2834.15,722.89 2838.95,722.89 ; 2834.15,723.19 2838.95,723.19 ; 2834.15,742.99 2840.75,742.99 ; 2834.15,757.09 2840.75,757.09 ; 2834.15,796.69 2882.45,796.69 ; 2834.15,796.99 2882.45,796.99 ; 2834.15,840.18 2900.45,840.18 ; 2834.15,840.48 2900.45,840.48 ; 2834.15,862.08 2900.45,862.08 ; 2834.15,862.38 2900.45,862.38 ; 2834.45,723.49 2839.25,723.49 ; 2834.45,723.79 2839.25,723.79 ; 2834.45,724.09 2839.25,724.09 ; 2834.45,795.79 2881.55,795.79 ; 2834.45,796.09 2881.85,796.09 ; 2834.45,796.39 2882.15,796.39 ; 2834.45,840.78 2900.45,840.78 ; 2834.45,841.08 2900.45,841.08 ; 2834.45,861.48 2900.45,861.48 ; 2834.45,861.78 2900.45,861.78 ; 2834.75,743.29 2840.75,743.29 ; 2834.75,756.79 2840.75,756.79 ; 2834.75,795.19 2880.95,795.19 ; 2834.75,795.49 2881.25,795.49 ; 2834.75,841.38 2900.45,841.38 ; 2834.75,841.68 2900.45,841.68 ; 2834.75,841.98 2900.45,841.98 ; 2834.75,860.88 2900.45,860.88 ; 2834.75,861.18 2900.45,861.18 ; 2835.05,794.59 2880.35,794.59 ; 2835.05,794.89 2880.65,794.89 ; 2835.05,842.28 2900.45,842.28 ; 2835.05,842.58 2900.45,842.58 ; 2835.05,842.88 2900.45,842.88 ; 2835.05,859.98 2900.45,859.98 ; 2835.05,860.28 2900.45,860.28 ; 2835.05,860.58 2900.45,860.58 ; 2835.35,743.59 2841.05,743.59 ; 2835.35,756.49 2841.05,756.49 ; 2835.35,793.69 2879.45,793.69 ; 2835.35,793.99 2879.75,793.99 ; 2835.35,794.29 2880.05,794.29 ; 2835.35,843.18 2900.45,843.18 ; 2835.35,843.48 2900.45,843.48 ; 2835.35,843.78 2900.45,843.78 ; 2835.35,859.08 2900.45,859.08 ; 2835.35,859.38 2900.45,859.38 ; 2835.35,859.68 2900.45,859.68 ; 2835.65,743.89 2841.05,743.89 ; 2835.65,756.19 2841.05,756.19 ; 2835.65,793.09 2878.85,793.09 ; 2835.65,793.39 2879.15,793.39 ; 2835.65,844.08 2900.45,844.08 ; 2835.65,844.38 2900.45,844.38 ; 2835.65,844.68 2900.45,844.68 ; 2835.65,858.18 2900.45,858.18 ; 2835.65,858.48 2900.45,858.48 ; 2835.65,858.78 2900.45,858.78 ; 2835.95,744.19 2841.05,744.19 ; 2835.95,755.89 2841.05,755.89 ; 2835.95,792.19 2845.25,792.19 ; 2835.95,792.49 2845.85,792.49 ; 2835.95,792.79 2846.75,792.79 ; 2835.95,844.98 2900.45,844.98 ; 2835.95,845.28 2900.45,845.28 ; 2835.95,845.58 2900.45,845.58 ; 2835.95,845.88 2900.45,845.88 ; 2835.95,856.98 2900.45,856.98 ; 2835.95,857.28 2900.45,857.28 ; 2835.95,857.58 2900.45,857.58 ; 2835.95,857.88 2900.45,857.88 ; 2836.25,744.49 2841.35,744.49 ; 2836.25,744.79 2841.35,744.79 ; 2836.25,755.29 2841.35,755.29 ; 2836.25,755.59 2841.35,755.59 ; 2836.25,791.59 2844.05,791.59 ; 2836.25,791.89 2844.65,791.89 ; 2836.25,846.18 2900.45,846.18 ; 2836.25,846.48 2900.45,846.48 ; 2836.25,846.78 2900.45,846.78 ; 2836.25,847.08 2900.45,847.08 ; 2836.25,847.38 2900.45,847.38 ; 2836.25,855.18 2900.45,855.18 ; 2836.25,855.48 2900.45,855.48 ; 2836.25,855.78 2900.45,855.78 ; 2836.25,856.08 2900.45,856.08 ; 2836.25,856.38 2900.45,856.38 ; 2836.25,856.68 2900.45,856.68 ; 2836.55,745.09 2841.35,745.09 ; 2836.55,745.39 2841.35,745.39 ; 2836.55,754.69 2841.35,754.69 ; 2836.55,754.99 2841.35,754.99 ; 2836.55,790.69 2842.55,790.69 ; 2836.55,790.99 2843.15,790.99 ; 2836.55,791.29 2843.45,791.29 ; 2836.55,847.68 2900.45,847.68 ; 2836.55,847.98 2900.45,847.98 ; 2836.55,848.28 2900.45,848.28 ; 2836.55,848.58 2900.45,848.58 ; 2836.55,848.88 2900.45,848.88 ; 2836.55,849.18 2900.45,849.18 ; 2836.55,849.48 2900.45,849.48 ; 2836.55,849.78 2900.45,849.78 ; 2836.55,850.08 2900.45,850.08 ; 2836.55,850.38 2900.45,850.38 ; 2836.55,850.68 2900.45,850.68 ; 2836.55,850.98 2900.45,850.98 ; 2836.55,851.58 2900.45,851.58 ; 2836.55,851.88 2900.45,851.88 ; 2836.55,852.18 2900.45,852.18 ; 2836.55,852.48 2900.45,852.48 ; 2836.55,852.78 2900.45,852.78 ; 2836.55,853.08 2900.45,853.08 ; 2836.55,853.38 2900.45,853.38 ; 2836.55,853.68 2900.45,853.68 ; 2836.55,853.98 2900.45,853.98 ; 2836.55,854.28 2900.45,854.28 ; 2836.55,854.58 2900.45,854.58 ; 2836.55,854.88 2900.45,854.88 ; 2836.85,745.69 2841.35,745.69 ; 2836.85,745.99 2841.65,745.99 ; 2836.85,746.29 2841.65,746.29 ; 2836.85,753.79 2841.65,753.79 ; 2836.85,754.09 2841.65,754.09 ; 2836.85,754.39 2841.35,754.39 ; 2836.85,790.09 2841.35,790.09 ; 2836.85,790.39 2841.95,790.39 ; 2836.85,851.28 2900.45,851.28 ; 2837.15,746.59 2841.65,746.59 ; 2837.15,746.89 2841.65,746.89 ; 2837.15,747.19 2841.65,747.19 ; 2837.15,747.49 2841.65,747.49 ; 2837.15,747.79 2841.65,747.79 ; 2837.15,748.09 2841.65,748.09 ; 2837.15,748.39 2841.65,748.39 ; 2837.15,748.69 2841.65,748.69 ; 2837.15,748.99 2841.65,748.99 ; 2837.15,749.29 2841.65,749.29 ; 2837.15,749.59 2841.95,749.59 ; 2837.15,749.89 2841.95,749.89 ; 2837.15,750.19 2841.95,750.19 ; 2837.15,750.49 2841.95,750.49 ; 2837.15,750.79 2841.65,750.79 ; 2837.15,751.09 2841.65,751.09 ; 2837.15,751.39 2841.65,751.39 ; 2837.15,751.69 2841.65,751.69 ; 2837.15,751.99 2841.65,751.99 ; 2837.15,752.29 2841.65,752.29 ; 2837.15,752.59 2841.65,752.59 ; 2837.15,752.89 2841.65,752.89 ; 2837.15,753.19 2841.65,753.19 ; 2837.15,753.49 2841.65,753.49 ; 2837.15,789.49 2840.15,789.49 ; 2837.15,789.79 2840.75,789.79 ; 2837.45,788.89 2838.95,788.89 ; 2837.45,789.19 2839.55,789.19 ; 2837.75,788.59 2838.35,788.59 ; 2840.15,705.79 2845.25,705.79 ; 2840.15,706.09 2844.95,706.09 ; 2840.15,706.39 2844.65,706.39 ; 2840.15,706.69 2844.65,706.69 ; 2840.15,706.99 2844.65,706.99 ; 2840.15,707.29 2844.35,707.29 ; 2840.15,707.59 2844.35,707.59 ; 2840.15,707.89 2844.35,707.89 ; 2840.15,708.19 2844.35,708.19 ; 2840.15,708.49 2844.35,708.49 ; 2840.15,708.79 2844.65,708.79 ; 2840.15,709.09 2844.65,709.09 ; 2840.45,704.89 2846.75,704.89 ; 2840.45,705.19 2846.15,705.19 ; 2840.45,705.49 2845.55,705.49 ; 2840.45,709.39 2844.95,709.39 ; 2840.45,709.69 2845.25,709.69 ; 2840.45,709.99 2845.55,709.99 ; 2840.45,710.29 2846.15,710.29 ; 2840.75,704.29 2859.05,704.29 ; 2840.75,704.59 2859.05,704.59 ; 2840.75,710.59 2847.35,710.59 ; 2840.75,710.89 2859.05,710.89 ; 2841.05,703.69 2859.05,703.69 ; 2841.05,703.99 2859.05,703.99 ; 2841.05,711.19 2859.05,711.19 ; 2841.35,703.39 2859.05,703.39 ; 2841.35,711.49 2859.05,711.49 ; 2841.35,711.79 2859.05,711.79 ; 2841.35,721.09 2857.85,721.09 ; 2841.65,703.09 2859.05,703.09 ; 2841.65,712.09 2859.05,712.09 ; 2841.65,720.79 2858.15,720.79 ; 2841.65,721.39 2857.55,721.39 ; 2841.65,721.69 2857.55,721.69 ; 2841.95,702.79 2859.05,702.79 ; 2841.95,712.39 2859.05,712.39 ; 2841.95,721.99 2857.25,721.99 ; 2842.25,702.49 2853.95,702.49 ; 2842.25,712.69 2859.05,712.69 ; 2842.25,720.49 2858.15,720.49 ; 2842.25,722.29 2856.95,722.29 ; 2842.55,702.19 2853.65,702.19 ; 2842.55,720.19 2848.85,720.19 ; 2842.55,722.59 2856.65,722.59 ; 2842.85,701.89 2853.35,701.89 ; 2842.85,712.99 2859.05,712.99 ; 2842.85,719.89 2846.75,719.89 ; 2843.15,713.29 2859.05,713.29 ; 2843.15,722.89 2856.05,722.89 ; 2843.45,701.59 2853.05,701.59 ; 2843.45,719.59 2846.15,719.59 ; 2843.45,723.19 2855.45,723.19 ; 2843.75,713.59 2859.05,713.59 ; 2843.75,719.29 2845.55,719.29 ; 2844.05,701.29 2852.75,701.29 ; 2844.05,718.99 2845.25,718.99 ; 2844.05,723.49 2855.15,723.49 ; 2844.35,713.89 2859.05,713.89 ; 2844.65,700.99 2852.15,700.99 ; 2844.65,718.69 2845.25,718.69 ; 2844.65,723.79 2854.25,723.79 ; 2845.55,700.69 2851.25,700.69 ; 2845.55,714.19 2859.05,714.19 ; 2845.85,724.09 2853.35,724.09 ; 2846.15,744.79 2851.55,744.79 ; 2846.15,745.09 2851.25,745.09 ; 2846.15,745.39 2851.25,745.39 ; 2846.15,745.69 2850.95,745.69 ; 2846.15,745.99 2850.95,745.99 ; 2846.15,746.29 2850.95,746.29 ; 2846.15,746.59 2850.95,746.59 ; 2846.15,746.89 2850.65,746.89 ; 2846.15,747.19 2850.65,747.19 ; 2846.15,747.49 2850.65,747.49 ; 2846.15,747.79 2850.65,747.79 ; 2846.15,748.09 2850.65,748.09 ; 2846.15,748.39 2850.65,748.39 ; 2846.15,748.69 2850.65,748.69 ; 2846.15,748.99 2850.65,748.99 ; 2846.15,749.29 2850.65,749.29 ; 2846.15,749.59 2850.65,749.59 ; 2846.15,749.89 2850.65,749.89 ; 2846.15,750.19 2850.65,750.19 ; 2846.15,750.49 2850.65,750.49 ; 2846.15,750.79 2850.65,750.79 ; 2846.15,751.09 2850.65,751.09 ; 2846.15,751.39 2850.65,751.39 ; 2846.15,751.69 2850.65,751.69 ; 2846.15,751.99 2850.65,751.99 ; 2846.15,752.29 2850.65,752.29 ; 2846.15,752.59 2850.65,752.59 ; 2846.15,752.89 2850.65,752.89 ; 2846.15,753.19 2850.65,753.19 ; 2846.15,753.49 2850.65,753.49 ; 2846.15,753.79 2850.65,753.79 ; 2846.15,754.09 2850.65,754.09 ; 2846.15,754.39 2850.65,754.39 ; 2846.15,754.69 2850.65,754.69 ; 2846.15,754.99 2850.65,754.99 ; 2846.15,755.29 2850.65,755.29 ; 2846.15,755.59 2850.65,755.59 ; 2846.15,755.89 2850.65,755.89 ; 2846.15,756.19 2850.65,756.19 ; 2846.15,756.49 2850.65,756.49 ; 2846.15,756.79 2850.65,756.79 ; 2846.15,757.09 2850.65,757.09 ; 2846.15,757.39 2850.65,757.39 ; 2846.15,757.69 2850.65,757.69 ; 2846.15,757.99 2850.65,757.99 ; 2846.15,758.29 2850.65,758.29 ; 2846.15,758.59 2850.65,758.59 ; 2846.15,758.89 2850.65,758.89 ; 2846.15,759.19 2850.65,759.19 ; 2846.15,759.49 2850.65,759.49 ; 2846.15,759.79 2850.65,759.79 ; 2846.15,760.09 2850.65,760.09 ; 2846.15,760.39 2850.65,760.39 ; 2846.15,760.69 2850.65,760.69 ; 2846.15,760.99 2850.65,760.99 ; 2846.15,761.29 2850.65,761.29 ; 2846.15,761.59 2850.65,761.59 ; 2846.15,909.18 2879.45,909.18 ; 2846.45,743.59 2852.45,743.59 ; 2846.45,743.89 2852.15,743.89 ; 2846.45,744.19 2851.85,744.19 ; 2846.45,744.49 2851.55,744.49 ; 2846.75,742.69 2854.25,742.69 ; 2846.75,742.99 2853.35,742.99 ; 2846.75,743.29 2852.75,743.29 ; 2846.75,909.48 2879.15,909.48 ; 2847.05,742.09 2865.05,742.09 ; 2847.05,742.39 2865.05,742.39 ; 2847.05,909.78 2878.85,909.78 ; 2847.35,741.49 2865.05,741.49 ; 2847.35,741.79 2865.05,741.79 ; 2847.35,792.79 2878.55,792.79 ; 2847.35,910.08 2878.55,910.08 ; 2847.65,724.39 2851.55,724.39 ; 2847.65,741.19 2865.05,741.19 ; 2847.95,700.39 2848.85,700.39 ; 2847.95,740.89 2865.05,740.89 ; 2847.95,792.49 2878.25,792.49 ; 2847.95,910.38 2878.25,910.38 ; 2848.25,740.59 2859.95,740.59 ; 2848.25,910.68 2877.95,910.68 ; 2848.55,740.29 2859.65,740.29 ; 2848.55,792.19 2877.95,792.19 ; 2848.85,739.99 2859.35,739.99 ; 2848.85,791.89 2877.65,791.89 ; 2848.85,910.98 2877.65,910.98 ; 2849.15,739.69 2859.05,739.69 ; 2849.15,911.28 2877.35,911.28 ; 2849.45,739.39 2858.75,739.39 ; 2849.45,791.59 2877.35,791.59 ; 2849.75,720.19 2858.45,720.19 ; 2849.75,791.29 2877.05,791.29 ; 2849.75,911.58 2877.05,911.58 ; 2850.05,739.09 2858.15,739.09 ; 2850.05,911.88 2876.75,911.88 ; 2850.35,790.99 2876.75,790.99 ; 2850.65,738.79 2857.55,738.79 ; 2850.65,790.69 2876.45,790.69 ; 2850.65,912.18 2876.45,912.18 ; 2850.95,790.39 2876.15,790.39 ; 2850.95,912.48 2876.15,912.48 ; 2851.25,738.49 2856.95,738.49 ; 2851.55,790.09 2875.85,790.09 ; 2851.55,912.78 2875.85,912.78 ; 2851.85,789.79 2875.55,789.79 ; 2851.85,913.08 2875.55,913.08 ; 2852.15,704.89 2859.05,704.89 ; 2852.15,719.89 2858.45,719.89 ; 2852.15,738.19 2856.05,738.19 ; 2852.45,789.49 2875.25,789.49 ; 2852.45,913.38 2875.25,913.38 ; 2852.75,705.19 2859.05,705.19 ; 2852.75,789.19 2874.95,789.19 ; 2852.75,913.68 2874.95,913.68 ; 2853.05,719.59 2858.45,719.59 ; 2853.05,913.98 2874.65,913.98 ; 2853.35,705.49 2859.05,705.49 ; 2853.35,719.29 2858.75,719.29 ; 2853.35,788.89 2874.65,788.89 ; 2853.65,705.79 2859.05,705.79 ; 2853.65,788.59 2874.35,788.59 ; 2853.65,914.28 2874.35,914.28 ; 2853.95,706.09 2859.05,706.09 ; 2853.95,706.39 2859.05,706.39 ; 2853.95,718.69 2858.75,718.69 ; 2853.95,718.99 2858.75,718.99 ; 2853.95,914.58 2874.05,914.58 ; 2854.25,706.69 2859.05,706.69 ; 2854.25,706.99 2859.05,706.99 ; 2854.25,707.29 2859.05,707.29 ; 2854.25,707.59 2859.05,707.59 ; 2854.25,707.89 2859.05,707.89 ; 2854.25,708.19 2859.05,708.19 ; 2854.25,708.49 2859.05,708.49 ; 2854.25,710.59 2859.05,710.59 ; 2854.25,714.49 2859.05,714.49 ; 2854.25,717.49 2859.05,717.49 ; 2854.25,717.79 2858.75,717.79 ; 2854.25,718.09 2858.75,718.09 ; 2854.25,718.39 2858.75,718.39 ; 2854.25,788.29 2874.05,788.29 ; 2854.55,700.69 2859.05,700.69 ; 2854.55,700.99 2859.05,700.99 ; 2854.55,701.29 2859.05,701.29 ; 2854.55,701.59 2859.05,701.59 ; 2854.55,701.89 2859.05,701.89 ; 2854.55,702.19 2859.05,702.19 ; 2854.55,702.49 2859.05,702.49 ; 2854.55,708.79 2859.05,708.79 ; 2854.55,709.09 2859.05,709.09 ; 2854.55,709.39 2859.05,709.39 ; 2854.55,709.69 2859.05,709.69 ; 2854.55,709.99 2859.05,709.99 ; 2854.55,710.29 2859.05,710.29 ; 2854.55,714.79 2859.05,714.79 ; 2854.55,715.09 2859.05,715.09 ; 2854.55,715.39 2859.05,715.39 ; 2854.55,715.69 2859.05,715.69 ; 2854.55,715.99 2859.05,715.99 ; 2854.55,716.29 2859.05,716.29 ; 2854.55,716.59 2859.05,716.59 ; 2854.55,716.89 2859.05,716.89 ; 2854.55,717.19 2859.05,717.19 ; 2854.55,787.99 2873.75,787.99 ; 2854.55,914.88 2873.75,914.88 ; 2854.85,915.18 2873.45,915.18 ; 2855.15,787.69 2873.45,787.69 ; 2855.45,787.39 2873.15,787.39 ; 2855.45,915.48 2873.15,915.48 ; 2855.75,787.09 2872.85,787.09 ; 2855.75,915.78 2872.85,915.78 ; 2856.35,786.79 2872.55,786.79 ; 2856.35,916.08 2872.55,916.08 ; 2856.65,742.69 2865.05,742.69 ; 2856.65,786.49 2872.25,786.49 ; 2856.65,916.38 2872.25,916.38 ; 2857.25,786.19 2871.95,786.19 ; 2857.25,916.68 2871.95,916.68 ; 2857.55,742.99 2865.05,742.99 ; 2857.55,785.89 2871.65,785.89 ; 2857.55,916.98 2871.65,916.98 ; 2857.85,917.28 2871.35,917.28 ; 2858.15,743.29 2865.05,743.29 ; 2858.15,785.59 2871.35,785.59 ; 2858.45,785.29 2871.05,785.29 ; 2858.45,917.58 2871.05,917.58 ; 2858.75,743.59 2865.05,743.59 ; 2858.75,917.88 2870.75,917.88 ; 2859.05,743.89 2865.05,743.89 ; 2859.05,744.19 2865.05,744.19 ; 2859.05,784.99 2870.75,784.99 ; 2859.35,744.49 2865.05,744.49 ; 2859.35,784.69 2870.45,784.69 ; 2859.35,918.18 2870.45,918.18 ; 2859.65,744.79 2865.05,744.79 ; 2859.65,745.09 2865.05,745.09 ; 2859.65,918.48 2870.15,918.48 ; 2859.95,745.39 2865.05,745.39 ; 2859.95,745.69 2865.05,745.69 ; 2859.95,784.39 2870.15,784.39 ; 2860.25,738.49 2865.05,738.49 ; 2860.25,738.79 2865.05,738.79 ; 2860.25,739.09 2865.05,739.09 ; 2860.25,739.39 2865.05,739.39 ; 2860.25,739.69 2865.05,739.69 ; 2860.25,739.99 2865.05,739.99 ; 2860.25,740.29 2865.05,740.29 ; 2860.25,740.59 2865.05,740.59 ; 2860.25,745.99 2865.05,745.99 ; 2860.25,746.29 2865.05,746.29 ; 2860.25,746.59 2865.05,746.59 ; 2860.25,746.89 2865.05,746.89 ; 2860.25,747.19 2865.05,747.19 ; 2860.25,747.49 2865.05,747.49 ; 2860.25,747.79 2865.05,747.79 ; 2860.25,748.09 2865.05,748.09 ; 2860.25,748.39 2865.05,748.39 ; 2860.25,748.69 2865.05,748.69 ; 2860.25,748.99 2865.05,748.99 ; 2860.25,749.29 2865.05,749.29 ; 2860.25,749.59 2865.05,749.59 ; 2860.25,749.89 2865.05,749.89 ; 2860.25,750.19 2865.05,750.19 ; 2860.25,750.49 2865.05,750.49 ; 2860.25,750.79 2865.05,750.79 ; 2860.25,751.09 2865.05,751.09 ; 2860.25,751.39 2865.05,751.39 ; 2860.25,751.69 2865.05,751.69 ; 2860.25,751.99 2865.05,751.99 ; 2860.25,752.29 2865.05,752.29 ; 2860.25,752.59 2865.05,752.59 ; 2860.25,752.89 2865.05,752.89 ; 2860.25,753.19 2865.05,753.19 ; 2860.25,753.49 2865.05,753.49 ; 2860.25,753.79 2865.05,753.79 ; 2860.25,754.09 2865.05,754.09 ; 2860.25,754.39 2865.05,754.39 ; 2860.25,754.69 2865.05,754.69 ; 2860.25,754.99 2865.05,754.99 ; 2860.25,755.29 2865.05,755.29 ; 2860.25,755.59 2865.05,755.59 ; 2860.25,755.89 2865.05,755.89 ; 2860.25,756.19 2865.05,756.19 ; 2860.25,756.49 2865.05,756.49 ; 2860.25,756.79 2865.05,756.79 ; 2860.25,757.09 2865.05,757.09 ; 2860.25,757.39 2865.05,757.39 ; 2860.25,757.69 2865.05,757.69 ; 2860.25,757.99 2865.05,757.99 ; 2860.25,758.29 2865.05,758.29 ; 2860.25,758.59 2865.05,758.59 ; 2860.25,758.89 2865.05,758.89 ; 2860.25,759.19 2865.05,759.19 ; 2860.25,759.49 2865.05,759.49 ; 2860.25,759.79 2865.05,759.79 ; 2860.25,760.09 2865.05,760.09 ; 2860.25,760.39 2865.05,760.39 ; 2860.25,760.69 2865.05,760.69 ; 2860.25,760.99 2865.05,760.99 ; 2860.25,761.29 2865.05,761.29 ; 2860.25,761.59 2865.05,761.59 ; 2860.25,784.09 2869.85,784.09 ; 2860.25,918.78 2869.85,918.78 ; 2860.55,783.79 2869.55,783.79 ; 2860.55,919.08 2869.55,919.08 ; 2861.15,783.49 2869.25,783.49 ; 2861.15,919.38 2869.25,919.38 ; 2861.45,783.19 2868.95,783.19 ; 2861.45,919.68 2868.95,919.68 ; 2862.05,782.89 2868.65,782.89 ; 2862.05,919.98 2868.65,919.98 ; 2862.35,782.59 2868.35,782.59 ; 2862.35,920.28 2868.35,920.28 ; 2862.65,920.58 2868.05,920.58 ; 2862.95,782.29 2868.05,782.29 ; 2863.25,781.99 2867.75,781.99 ; 2863.25,920.88 2867.75,920.88 ; 2863.55,921.18 2867.45,921.18 ; 2863.85,781.69 2867.45,781.69 ; 2864.15,781.39 2867.15,781.39 ; 2864.15,921.48 2867.15,921.48 ; 2864.45,700.69 2868.95,700.69 ; 2864.45,700.99 2868.95,700.99 ; 2864.45,701.29 2868.95,701.29 ; 2864.45,701.59 2868.95,701.59 ; 2864.45,701.89 2868.95,701.89 ; 2864.45,702.19 2868.95,702.19 ; 2864.45,702.49 2868.95,702.49 ; 2864.45,702.79 2868.95,702.79 ; 2864.45,703.09 2868.95,703.09 ; 2864.45,703.39 2868.95,703.39 ; 2864.45,703.69 2868.95,703.69 ; 2864.45,703.99 2868.95,703.99 ; 2864.45,704.29 2868.95,704.29 ; 2864.45,704.59 2868.95,704.59 ; 2864.45,704.89 2868.95,704.89 ; 2864.45,705.19 2868.95,705.19 ; 2864.45,705.49 2868.95,705.49 ; 2864.45,705.79 2868.95,705.79 ; 2864.45,706.09 2868.95,706.09 ; 2864.45,706.39 2868.95,706.39 ; 2864.45,706.69 2868.95,706.69 ; 2864.45,706.99 2868.95,706.99 ; 2864.45,707.29 2868.95,707.29 ; 2864.45,707.59 2868.95,707.59 ; 2864.45,707.89 2868.95,707.89 ; 2864.45,708.19 2868.95,708.19 ; 2864.45,708.49 2868.95,708.49 ; 2864.45,708.79 2868.95,708.79 ; 2864.45,709.09 2868.95,709.09 ; 2864.45,709.39 2868.95,709.39 ; 2864.45,709.69 2868.95,709.69 ; 2864.45,709.99 2868.95,709.99 ; 2864.45,710.29 2868.95,710.29 ; 2864.45,710.59 2868.95,710.59 ; 2864.45,710.89 2868.95,710.89 ; 2864.45,711.19 2868.95,711.19 ; 2864.45,711.49 2868.95,711.49 ; 2864.45,711.79 2868.95,711.79 ; 2864.45,712.09 2868.95,712.09 ; 2864.45,712.39 2868.95,712.39 ; 2864.45,712.69 2868.95,712.69 ; 2864.45,712.99 2868.95,712.99 ; 2864.45,713.29 2868.95,713.29 ; 2864.45,713.59 2868.95,713.59 ; 2864.45,713.89 2868.95,713.89 ; 2864.45,714.19 2868.95,714.19 ; 2864.45,714.49 2868.95,714.49 ; 2864.45,714.79 2868.95,714.79 ; 2864.45,715.09 2868.95,715.09 ; 2864.45,715.39 2868.95,715.39 ; 2864.45,715.69 2868.95,715.69 ; 2864.45,715.99 2869.25,715.99 ; 2864.45,716.29 2869.25,716.29 ; 2864.45,716.59 2869.25,716.59 ; 2864.45,716.89 2869.25,716.89 ; 2864.45,717.19 2869.55,717.19 ; 2864.45,717.49 2869.55,717.49 ; 2864.45,717.79 2869.85,717.79 ; 2864.45,718.09 2869.85,718.09 ; 2864.45,718.39 2870.15,718.39 ; 2864.45,718.69 2870.45,718.69 ; 2864.45,718.99 2870.75,718.99 ; 2864.45,719.29 2871.35,719.29 ; 2864.45,719.59 2871.95,719.59 ; 2864.45,719.89 2873.15,719.89 ; 2864.45,720.19 2877.95,720.19 ; 2864.45,720.49 2878.25,720.49 ; 2864.45,720.79 2878.55,720.79 ; 2864.45,721.09 2878.85,721.09 ; 2864.45,721.39 2879.15,721.39 ; 2864.45,721.69 2879.45,721.69 ; 2864.45,721.99 2868.95,721.99 ; 2864.45,722.29 2868.95,722.29 ; 2864.45,722.59 2868.95,722.59 ; 2864.45,722.89 2868.95,722.89 ; 2864.45,723.19 2868.95,723.19 ; 2864.45,723.49 2868.95,723.49 ; 2864.45,723.79 2868.95,723.79 ; 2864.45,724.09 2868.95,724.09 ; 2864.45,921.78 2866.85,921.78 ; 2864.75,781.09 2866.85,781.09 ; 2865.05,780.79 2866.25,780.79 ; 2865.05,922.08 2866.55,922.08 ; 2869.55,721.99 2879.45,721.99 ; 2869.85,722.29 2879.75,722.29 ; 2870.15,722.59 2880.05,722.59 ; 2870.45,722.89 2880.05,722.89 ; 2870.45,738.49 2874.95,738.49 ; 2870.45,738.79 2874.95,738.79 ; 2870.45,739.09 2874.95,739.09 ; 2870.45,739.39 2874.95,739.39 ; 2870.45,739.69 2874.95,739.69 ; 2870.45,739.99 2874.95,739.99 ; 2870.45,740.29 2874.95,740.29 ; 2870.45,740.59 2874.95,740.59 ; 2870.45,740.89 2874.95,740.89 ; 2870.45,741.19 2874.95,741.19 ; 2870.45,741.49 2874.95,741.49 ; 2870.45,741.79 2874.95,741.79 ; 2870.45,742.09 2874.95,742.09 ; 2870.45,742.39 2874.95,742.39 ; 2870.45,742.69 2874.95,742.69 ; 2870.45,742.99 2874.95,742.99 ; 2870.45,743.29 2874.95,743.29 ; 2870.45,743.59 2874.95,743.59 ; 2870.45,743.89 2874.95,743.89 ; 2870.45,744.19 2874.95,744.19 ; 2870.45,744.49 2874.95,744.49 ; 2870.45,744.79 2874.95,744.79 ; 2870.45,745.09 2874.95,745.09 ; 2870.45,745.39 2874.95,745.39 ; 2870.45,745.69 2874.95,745.69 ; 2870.45,745.99 2874.95,745.99 ; 2870.45,746.29 2874.95,746.29 ; 2870.45,746.59 2874.95,746.59 ; 2870.45,746.89 2874.95,746.89 ; 2870.45,747.19 2874.95,747.19 ; 2870.45,747.49 2874.95,747.49 ; 2870.45,747.79 2874.95,747.79 ; 2870.45,748.09 2874.95,748.09 ; 2870.45,748.39 2874.95,748.39 ; 2870.45,748.69 2874.95,748.69 ; 2870.45,748.99 2874.95,748.99 ; 2870.45,749.29 2874.95,749.29 ; 2870.45,749.59 2874.95,749.59 ; 2870.45,749.89 2874.95,749.89 ; 2870.45,750.19 2874.95,750.19 ; 2870.45,750.49 2874.95,750.49 ; 2870.45,750.79 2874.95,750.79 ; 2870.45,751.09 2874.95,751.09 ; 2870.45,751.39 2874.95,751.39 ; 2870.45,751.69 2874.95,751.69 ; 2870.45,751.99 2874.95,751.99 ; 2870.45,752.29 2874.95,752.29 ; 2870.45,752.59 2874.95,752.59 ; 2870.45,752.89 2874.95,752.89 ; 2870.45,753.19 2874.95,753.19 ; 2870.45,753.49 2874.95,753.49 ; 2870.45,753.79 2874.95,753.79 ; 2870.45,754.09 2875.25,754.09 ; 2870.45,754.39 2875.25,754.39 ; 2870.45,754.69 2875.25,754.69 ; 2870.45,754.99 2875.55,754.99 ; 2870.45,755.29 2875.55,755.29 ; 2870.45,755.59 2875.85,755.59 ; 2870.45,755.89 2876.15,755.89 ; 2870.45,756.19 2876.45,756.19 ; 2870.45,756.49 2876.75,756.49 ; 2870.45,756.79 2877.05,756.79 ; 2870.45,757.09 2877.65,757.09 ; 2870.45,757.39 2878.55,757.39 ; 2870.45,757.69 2883.95,757.69 ; 2870.45,757.99 2884.25,757.99 ; 2870.45,758.29 2884.55,758.29 ; 2870.45,758.59 2884.55,758.59 ; 2870.45,758.89 2884.85,758.89 ; 2870.45,759.19 2885.15,759.19 ; 2870.45,759.49 2874.95,759.49 ; 2870.45,759.79 2874.95,759.79 ; 2870.45,760.09 2874.95,760.09 ; 2870.45,760.39 2874.95,760.39 ; 2870.45,760.69 2874.95,760.69 ; 2870.45,760.99 2874.95,760.99 ; 2870.45,761.29 2874.95,761.29 ; 2870.45,761.59 2874.95,761.59 ; 2871.05,723.19 2879.75,723.19 ; 2871.35,723.49 2879.15,723.49 ; 2871.95,723.79 2878.55,723.79 ; 2872.85,724.09 2877.65,724.09 ; 2874.35,719.89 2877.95,719.89 ; 2874.35,724.39 2876.75,724.39 ; 2875.55,719.59 2877.65,719.59 ; 2875.55,759.49 2885.45,759.49 ; 2875.85,759.79 2885.75,759.79 ; 2876.15,719.29 2877.35,719.29 ; 2876.15,760.09 2886.05,760.09 ; 2876.45,718.99 2877.05,718.99 ; 2876.45,760.39 2886.05,760.39